# EAGLE board mobileduino_1.0 (EAGLE 6.2)
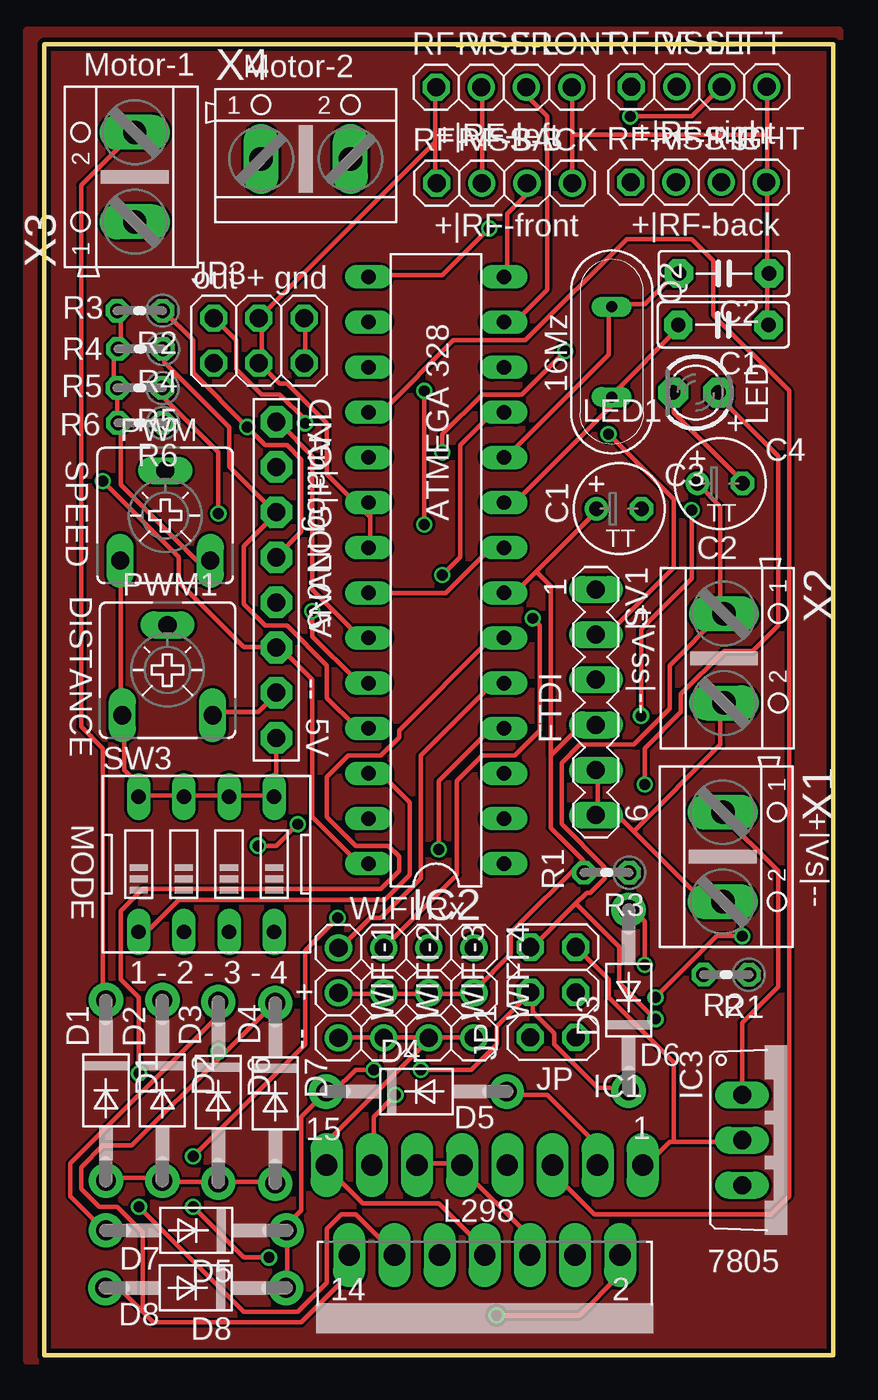
[diagram p0: board, top side]
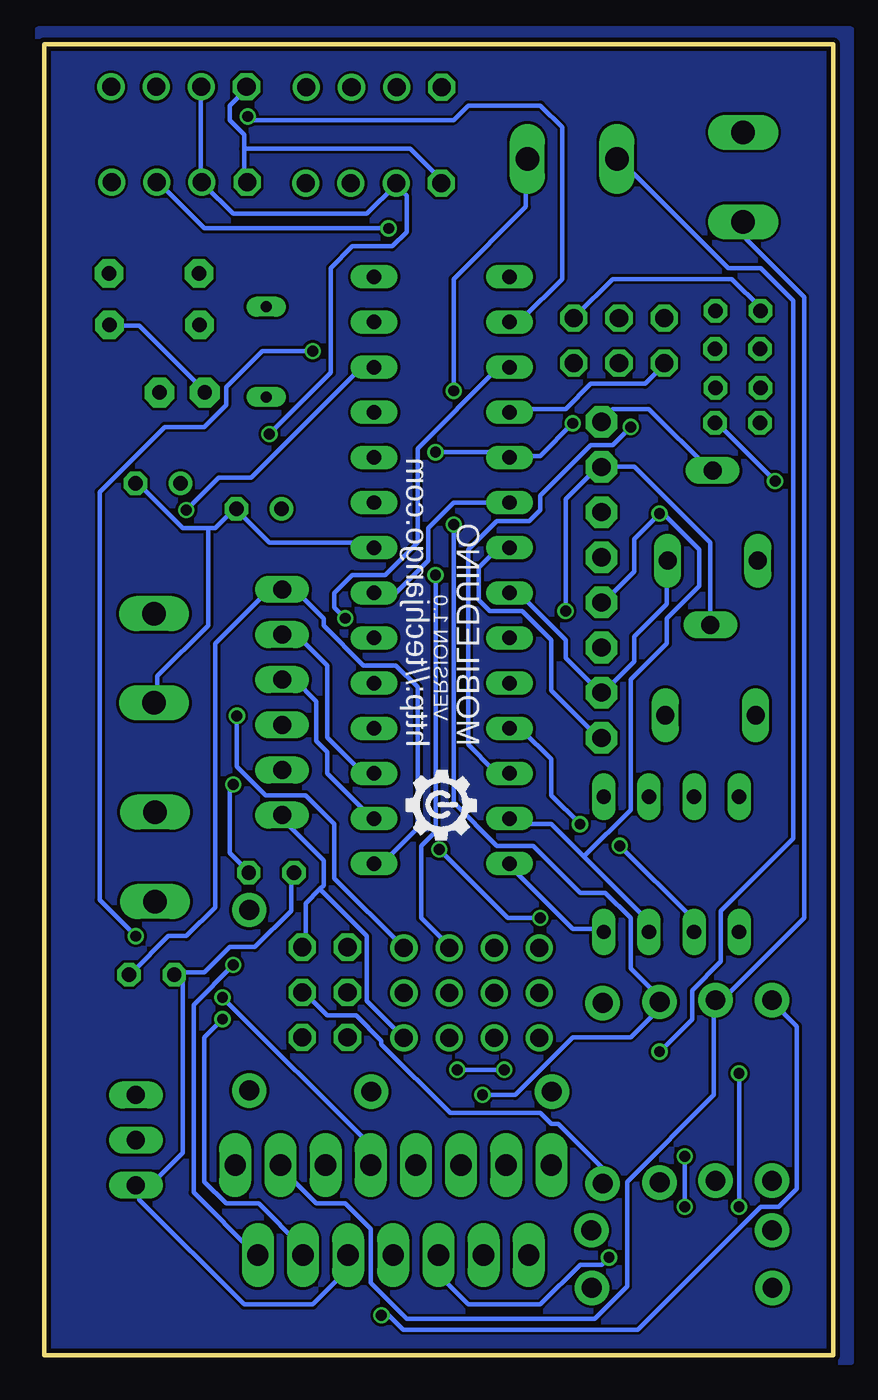
[diagram p1: board, bottom side, seen from below]

Size 44.39 x 73.76 mm. Coordinates in mm from the lower left corner, seen from the top.
Outline: 0,73.75 44.39,73.75 44.39,0 0,0 0,73.75
Copper layers (1*16): Top 0.035mm / dielectric 1.5mm / Bottom 0.035mm
Design rules: minimum track width 6mil, minimum drill 12mil, track to track 6mil, track to pad 6mil, pad to pad 6mil, via to via 6mil, smd to smd 0mil, copper to edge 10mil, drill to drill 10mil, minimum pad ring 10mil, minimum via ring 6mil, stop-mask expansion 2mil, vias tented up to drill 100mil, thermal gap 10mil

## Footprints (pad centres in the part's own frame; a part is rotated, then mirrored left to right if it is on the bottom)
1X08-BIG = drill 1.016 pad 1.778 octagon: 1 -8.89,0; 2 -6.35,0; 3 -3.81,0; 4 -1.27,0; 5 1.27,0; 6 3.81,0; 7 6.35,0; 8 8.89,0
C5B2.5 = drill 0.813 pad 1.6 octagon: 1 -2.54,0; 2 2.54,0
TT2D5 = drill 0.813: + -1.27,0 | drill 0.813 octagon: - 1.27,0
DO41-10 = drill 1.118 pad 1.93: A 5.08,0; C -5.08,0
MULTIWATT-15 = drill 1.2 long: 1 -8.89,-7.62; 2 -7.62,-2.54; 3 -6.35,-7.62; 4 -5.08,-2.54; 5 -3.81,-7.62; 6 -2.54,-2.54; 7 -1.27,-7.62; 8 0,-2.54; 9 1.27,-7.62; 10 2.54,-2.54; 11 3.81,-7.62; 12 5.08,-2.54; 13 6.35,-7.62; 14 7.62,-2.54; 15 8.89,-7.62
DIL28-3 = drill 0.813 long: 1 -16.51,-3.81; 2 -13.97,-3.81; 3 -11.43,-3.81; 4 -8.89,-3.81; 5 -6.35,-3.81; 6 -3.81,-3.81; 7 -1.27,-3.81; 8 1.27,-3.81; 9 3.81,-3.81; 10 6.35,-3.81; 11 8.89,-3.81; 12 11.43,-3.81; 13 13.97,-3.81; 14 16.51,-3.81; 15 16.51,3.81; 16 13.97,3.81; 17 11.43,3.81; 18 8.89,3.81; 19 6.35,3.81; 20 3.81,3.81; 21 1.27,3.81; 22 -1.27,3.81; 23 -3.81,3.81; 24 -6.35,3.81; 25 -8.89,3.81; 26 -11.43,3.81; 27 -13.97,3.81; 28 -16.51,3.81
TO220V = drill 1.016 long: 1 -2.54,-2.54; 2 0,-2.54; 3 2.54,-2.54
2X03 = drill 1.016 octagon: 1 -2.54,-1.27; 2 -2.54,1.27; 3 0,-1.27; 4 0,1.27; 5 2.54,-1.27; 6 2.54,1.27
LED3MM = drill 0.813 pad 1.676 octagon: A -1.27,0; K 1.27,0
CA6V = drill 1.016 long: A -2.54,-2.54; E 2.54,-2.54; S 0,2.54
QS = drill 0.61 long: 1 -2.54,0; 2 2.54,0
0204V = drill 0.813 octagon: 1 -1.27,0; 2 1.27,0
1X03 = drill 1.016: 1 -2.54,0; 2 0,0; 3 2.54,0
1X01 = drill 1.016 octagon: 1 0,0
MA06-1 = drill 1.016 long: 1 -6.35,0; 2 -3.81,0; 3 -1.27,0; 4 1.27,0; 5 3.81,0; 6 6.35,0
EDG-04 = drill 0.813 long: 1 -3.81,-3.81; 2 -1.27,-3.81; 3 1.27,-3.81; 4 3.81,-3.81; 5 3.81,3.81; 6 1.27,3.81; 7 -1.27,3.81; 8 -3.81,3.81
AK500/2 = drill 1.321 long: 1 -2.515,0; 2 2.515,0

## Placement (x,y rotation side)
ANALOG|+|GND  [1X08-BIG]  13.05,43.62 270 top
C1  [C5B2.5]  38.2,57.98 180 top
C2  [C5B2.5]  38.23,60.86 180 top
C3  [TT2D5]  32.32,47.62 0 top
C4  [TT2D5]  38,49.05 0 top
D1  1N4004  [DO41-10]  3.46,14.89 270 top
D2  1N4004  [DO41-10]  6.64,14.89 270 top
D3  1N4004  [DO41-10]  32.86,19.97 90 top
D4  1N4004  [DO41-10]  20.92,14.83 0 top
D5  1N4004  [DO41-10]  8.54,7.02 180 top
D6  1N4004  [DO41-10]  9.78,14.8 270 top
D7  1N4004  [DO41-10]  12.99,14.73 270 top
D8  1N4004  [DO41-10]  8.51,3.78 180 top
IC1  L298  [MULTIWATT-15]  24.77,3.08 180 top
IC2  ATMEGA168V-10P  [DIL28-3]  22.03,44.16 90 top
IC3  7805TV  [TO220V]  41.78,12.1 270 top
JP1  [2X03]  28.61,20.42 90 top
JP3  [2X03]  12.06,57.09 0 top
LED1  [LED3MM]  36.64,54.17 180 top
PWM  [CA6V]  6.79,47.24 0 top
PWM1  [CA6V]  6.92,38.54 0 top
Q2  [QS]  31.91,56.45 270 top
R1  [0204V]  38.35,21.4 180 top
R2  [0204V]  5.37,58.77 180 top
R3  [0204V]  31.62,27.15 180 top
R4  [0204V]  5.4,56.61 180 top
R5  [0204V]  5.37,54.42 180 top
R6  [0204V]  5.4,52.45 180 top
RF-BACK  [1X03]  27.15,65.94 0 top
RF-FRONT  [1X03]  27.11,71.34 0 top
RF-LEFT  [1X03]  38.1,71.37 0 top
RF-RIGHT  [1X03]  38.07,66.01 0 top
RF-VSS-B  [1X01]  22.07,65.94 0 top
RF-VSS-F  [1X01]  33.02,71.37 0 top
RF-VSS-L  [1X01]  22.03,71.34 0 top
RF-VSS-R  [1X01]  32.99,66.01 0 top
SV1  [MA06-1]  31.02,36.73 270 top
SW3  [EDG-04]  9.11,27.62 0 top
WIFI-1  [1X03]  16.54,20.38 270 top
WIFI-2  [1X03]  19.08,20.38 270 top
WIFI-3  [1X03]  21.62,20.38 270 top
WIFI-4  [1X03]  24.16,20.38 270 top
X1  [AK500/2]  38.16,28.04 270 top
X2  [AK500/2]  38.23,39.21 270 top
X3  [AK500/2]  5.08,66.29 90 top
X4  [AK500/2]  14.7,67.31 0 top

## Library data of the parts
ANALOG|+|GND C3 C4 D1-D8 IC2 LED1 R1-R6 RF-BACK RF-FRONT RF-LEFT RF-RIGHT WIFI-1-WIFI-4 = adafruit
C1 C2 = capacitor-wima
IC1 = st-microelectronics
IC3 = linear
JP1 JP3 RF-VSS-B RF-VSS-F RF-VSS-L RF-VSS-R = pinhead
PWM PWM1 = pot
Q2 SW3 = special
SV1 = con-lstb
X1-X4 = con-ptr500

## Nets
N$1: IC1.5 IC2.18 JP3.1
N$2: D1.C D3.A IC1.2 X3.2
N$3: D2.C D4.A IC1.3 X3.1
N$4: D5.A D6.C IC1.13 X4.2
N$5: D7.C D8.A IC1.14 X4.1
N$6: C4.+ IC1.4 JP1.6 X2.1
N$7: IC2.1 R1.1 SV1.1
N$8: C1.2 IC2.9 Q2.2
N$9: IC1.7 IC2.19 JP3.2
N$10: C2.2 IC2.10 Q2.1
N$11: IC3.1 X1.1
N$12: IC2.16 RF-LEFT.2
N$13: ANALOG|+|GND.1 IC2.23 PWM.S
N$14: IC2.12 WIFI-4.1
N$15: IC2.11 WIFI-3.1
N$16: IC2.17 WIFI-2.1
N$17: IC2.5 WIFI-1.1
N$18: D3.C D4.C D5.C D8.C JP1.4
N$19: IC1.10 IC2.4
N$20: IC1.12 IC2.6
N$21: IC2.15 RF-RIGHT.2
N$22: ANALOG|+|GND.7 C1.1 C2.1 C3.- C4.- IC1.1 IC1.8 IC1.15 IC2.8 IC2.22 IC3.2 JP1.5 JP3.5 JP3.6 LED1.K PWM1.E PWM.E R2.2 R4.2 R5.2 R6.2 RF-BACK.3 RF-FRONT.3 RF-LEFT.3 RF-RIGHT.3 SV1.5 SV1.6 WIFI-1.3 WIFI-2.3 WIFI-3.3 WIFI-4.3 X1.2 X2.2
N$23: IC2.14 RF-BACK.2
N$24: IC2.13 RF-FRONT.2
N$25: IC2.3 RF-BACK.1 RF-FRONT.1 RF-LEFT.1 RF-RIGHT.1 SV1.2
N$27: D1.A D2.A D6.A D7.A JP1.3
N$28: ANALOG|+|GND.2 IC2.24 PWM1.S
N$29: ANALOG|+|GND.3 IC2.25 R4.1 SW3.2
N$30: ANALOG|+|GND.4 IC2.26 R2.1 SW3.1
N$31: ANALOG|+|GND.5 IC2.27 R5.1 SW3.3
N$32: IC2.2 SV1.3
N$33: LED1.A R3.1
N$72: ANALOG|+|GND.6 IC2.28 R6.1 SW3.4
N$74: ANALOG|+|GND.8 C3.+ IC1.6 IC1.9 IC1.11 IC2.7 IC2.20 IC2.21 IC3.3 JP3.3 JP3.4 PWM1.A PWM.A R1.2 R3.2 RF-VSS-B.1 RF-VSS-F.1 RF-VSS-L.1 RF-VSS-R.1 SV1.4 SW3.5 SW3.6 SW3.7 SW3.8 WIFI-1.2 WIFI-2.2 WIFI-3.2 WIFI-4.2

## Tracks (layer width: path | path; a pad name or v marks a point on that pad's centre or on a via)
GND
  pour Bottom: -0.98,74.58 44.74,74.58 44.74,-0.35 -0.98,-0.35
  pour Top: -0.98,74.58 44.74,74.58 44.74,-0.35 -0.98,-0.35
N$1
  Top 0.254: IC1.5 28.68,10.57 28.68,10.17 30.92,7.93 40.87,7.93 41.89,8.95 41.89,54.26 37.62,58.53 37.62,61.58 36.4,62.79 32.75,62.79 27.06,57.11 22.99,57.11 19.13,53.24 18.32,53.24 IC2.18
  Bottom 0.254: IC2.18 18.12,53.24 15.07,53.24 13.65,54.67 10.6,54.67 9.58,55.68 JP3.1
N$2  (via drill 0.61)
  Top 0.254: v33.76,21.95 33.76,24.39 32.95,25.2 D3.A | D1.C 3.28,20.12 3.28,34.14 2.06,35.36 2.06,65.84 4.91,68.69 X3.2 | v25.43,2.24 30.11,2.24 32.34,4.48 32.34,5.49 IC1.2
  Bottom 0.254: v33.76,21.95 36,19.72 36,9.15 32.54,5.7 IC1.2 | v25.43,2.24 25.03,2.24 24.21,1.43 11,1.43 4.1,8.34 3.08,8.34 2.06,9.35 2.06,18.5 3.49,19.92 D1.C
N$3
  Top 0.254: IC1.3 30.92,10.78 30.92,11.99 28.28,14.64 26.04,14.64 D4.A
  Bottom 0.254: 6.74,19.51 6.74,14.64 11.61,9.76 11.61,3.87 13.44,2.04 24.01,2.04 26.04,4.07 26.04,7.12 27.46,8.54 29.09,8.54 31.12,10.57 IC1.3 | 6.74,19.51 6.74,19.92 D2.C 6.74,19.51 | 6.74,19.51 1.66,24.59 1.66,59.54 4.91,62.79 4.91,63.61 X3.1
N$4  (via drill 0.61)
  Top 0.254: v19.74,14.64 18.52,13.42 18.52,10.78 IC1.13 | D5.A 3.28,7.12 1.45,8.95 1.45,10.78 9.58,18.9 9.58,19.72 D6.C | v21.37,46.74 v21.37,54.26
  Bottom 0.254: v19.74,14.64 17.91,14.64 14.66,17.89 11.41,17.89 9.58,19.72 D6.C 9.58,19.92 11.41,21.75 11.41,24.59 12.83,26.02 14.26,26.02 16.9,28.66 18.93,28.66 21.37,31.1 v21.37,46.74 | v21.37,54.26 21.37,60.56 17.3,64.62 17.3,67.27 X4.2
N$5  (via drill 0.61)
  Top 0.254: 5.52,2.44 4.3,3.66 3.49,3.66 D8.A | 5.52,2.44 6.13,1.83 14.46,1.83 17.1,4.48 17.1,5.49 IC1.14 | 9.99,16.87 4.91,11.79 3.28,11.79 2.06,10.57 2.06,9.35 3.08,8.34 4.1,8.34 5.52,6.91 5.52,2.44 | 9.99,16.87 12.83,19.72 D7.C | 9.99,16.87 v9.79,17.07
  Bottom 0.254: v9.79,17.07 7.96,18.9 7.96,20.53 6.33,22.15 6.33,25 2.27,29.06 2.27,59.34 4.1,61.17 5.92,61.17 12.02,67.27 X4.1
N$6  (via drill 0.61)
  Top 0.254: C4.+ 36.81,48.98 38.03,47.76 38.03,41.87 X2.1 38.03,41.66 35.19,38.82 35.19,36.38 33.15,34.35 30.11,34.35 29.09,33.33 29.09,29.88 31.53,27.44 31.53,26.83 30.71,26.02 30.51,26.02 29.9,25.41 | 29.9,25.41 27.46,22.97 JP1.6 | v34.37,18.9 32.34,20.94 32.34,22.97 29.9,25.41
  Bottom 0.254: v34.37,18.9 35.39,17.89 35.39,9.76 34.17,8.54 32.34,8.54 29.9,6.1 29.9,5.7 IC1.4
N$7
  Bottom 0.254: IC2.1 25.84,27.84 25.23,27.84 23.4,29.67 23.4,37.6 24.62,38.82 26.45,38.82 28.68,41.05 28.68,41.46 30.31,43.08 30.92,43.08 SV1.1 31.12,43.08 31.73,43.08 34.78,40.04 34.78,25.2 36.4,23.58 37.42,23.58 39.45,21.55 R1.1
N$8
  Top 0.254: C1.2 35.79,57.92 31.93,54.06 Q2.2 31.93,53.85 31.93,53.45 26.65,48.16 26.04,48.16 IC2.9
N$9  (via drill 0.61)
  Top 0.254: v14.66,52.43 14.66,52.63 13.24,54.06 12.22,54.06 10.8,55.48 10.8,57.11 9.58,58.32 JP3.2 | v34.37,20.12 37.83,23.58 v39.25,23.58 | v29.29,56.5 26.85,54.06 24.62,54.06 22.38,51.82 v22.38,50.81
  Bottom 0.254: v14.66,52.43 16.49,50.6 18.12,50.6 IC2.19 18.32,50.6 18.52,50.81 v22.38,50.81 | v34.37,20.12 26.04,11.79 26.04,10.78 IC1.7 | v39.25,23.58 41.28,25.61 41.28,48.57 37.62,52.23 35.39,52.23 34.17,53.45 34.17,54.46 32.14,56.5 v29.29,56.5
N$10
  Top 0.254: C2.2 35.59,60.97 33.76,59.14 31.93,59.14 Q2.1 31.73,58.93 31.73,56.29 26.04,50.6 IC2.10
N$11
  Top 0.254: IC3.1 39.25,18.7 41.28,20.73 41.28,27.23 38.03,30.49 X1.1
N$12  (via drill 0.61)
  Top 0.254: v32.95,69.7 36.4,69.7 38.03,71.33 RF-LEFT.2
  Bottom 0.254: v32.95,69.7 32.75,69.5 21.37,69.5 20.55,70.31 16.49,70.31 15.27,69.09 15.27,60.56 17.51,58.32 18.12,58.32 IC2.16
N$13
  Top 0.254: IC2.23 18.12,40.44 17.71,40.44 15.07,43.08 15.07,50.6 13.24,52.43 ANALOG|+|GND.1
  Bottom 0.254: PWM.S 6.94,49.79 10.39,53.24 12.43,53.24 13.04,52.63 ANALOG|+|GND.1
N$14  (via drill 0.61)
  Top 0.254: v36.4,47.55 36.4,43.69 33.56,40.85 v33.56,35.97
  Bottom 0.254: v36.4,47.55 34.58,49.38 32.75,49.38 26.65,55.48 26.04,55.48 IC2.12 | v33.56,35.97 33.56,33.13 31.93,31.5 29.7,31.5 28.07,29.88 28.07,26.83 24.21,22.97 WIFI-4.1
N$15  (via drill 0.61)
  Top 0.254: v22.38,43.9 23.4,44.91 23.4,51.21 25.23,53.04 IC2.11
  Bottom 0.254: v22.38,43.9 22.38,29.47 23.2,28.66 23.2,24.59 21.57,22.97 WIFI-3.1
N$16  (via drill 0.61)
  Top 0.254: v27.46,41.46 27.87,41.05 27.87,35.16 26.45,33.74 24.62,33.74 23.2,32.31 23.2,27.03 19.13,22.97 WIFI-2.1
  Bottom 0.254: v27.46,41.46 28.07,42.07 28.07,42.88 27.06,43.9 25.23,43.9 23.4,45.73 23.4,51.01 18.93,55.48 18.32,55.48 IC2.17
N$17
  Top 0.254: IC2.5 25.23,37.8 21.16,33.74 21.16,26.83 18.93,24.59 18.32,24.59 16.69,22.97 WIFI-1.1
N$18  (via drill 0.61)
  Top 0.254: D3.C 32.75,15.04 31.12,15.04 28.68,17.48 28.68,18.09 27.46,19.31 27.46,20.33 JP1.4 27.26,20.33 25.43,18.5 25.43,17.48 24.01,16.06 v21.16,16.06 | D8.C 13.65,3.87 13.65,6.91 D5.C 13.44,7.12 14.46,8.13 14.46,13.42 15.68,14.64 D4.C 15.88,14.84 16.29,14.84 17.51,16.06 v18.52,16.06
  Bottom 0.254: v18.52,16.06 v21.16,16.06
N$19  (via drill 0.61)
  Top 0.254: v22.18,28.45 22.18,32.31 25.03,35.16 25.84,35.16 IC2.4 | v16.49,24.59 14.66,22.76 14.66,17.48 v8.36,11.18 | v8.36,8.34 11.21,5.49 v12.63,5.49
  Bottom 0.254: v22.18,28.45 18.32,24.59 v16.49,24.59 | v8.36,8.34 v8.36,11.18 | v12.63,5.49 13.04,5.09 14.26,5.09 16.49,2.85 20.55,2.85 22.18,4.48 22.18,5.49 IC1.10
N$20  (via drill 0.61)
  Top 0.254: v5.31,15.86 5.31,20.12 4.3,21.14 4.3,25 5.52,26.22 18.93,26.22 19.95,27.23 19.95,28.05 19.34,28.66 17.51,28.66 15.88,30.28 15.88,32.52 17.1,33.74 18.93,33.74 19.95,34.75 19.95,35.16 25.03,40.24 25.84,40.24 IC2.6 | v5.31,8.34 11.21,2.44 14.26,2.44 15.88,4.07 15.88,7.12 16.69,7.93 17.51,7.93 19.74,5.7 IC1.12
  Bottom 0.254: v5.31,8.34 v5.31,15.86
N$21  (via drill 0.61)
  Top 0.254: v25.03,63.4 22.38,60.76 18.32,60.76 IC2.15
  Bottom 0.254: v25.03,63.4 35.39,63.4 38.03,66.05 RF-RIGHT.2
N$22
  Top 0.254: WIFI-1.3 16.69,17.89 18.93,17.89 WIFI-2.3 19.13,17.89 21.57,17.89 WIFI-3.3 | WIFI-4.3 24.01,17.89 21.77,17.89 WIFI-3.3 | WIFI-3.3 21.57,17.68 15.88,11.99 15.88,10.78 IC1.15 15.88,10.57 17.91,8.54 22.18,8.54 24.62,6.1 24.62,5.7 IC1.8 | 35.39,11.99 35.19,11.99 33.76,10.57 IC1.1 | 35.39,11.99 39.05,11.99 IC3.2 | SV1.5 31.12,32.92 31.12,30.49 SV1.6 31.12,30.28 32.34,30.28 33.15,29.47 | 33.15,29.47 37.01,25.61 38.03,25.61 X1.2 | 33.15,29.47 38.03,34.35 38.03,36.58 X2.2 | 35.39,11.99 35.39,16.47 31.73,20.12 31.73,21.14 29.9,22.97 JP1.5 | 29.7,68.69 29.7,71.33 RF-FRONT.3 | 29.7,68.69 29.7,66.05 RF-BACK.3 | 40.67,68.69 40.67,66.05 RF-RIGHT.3 40.67,65.84 40.67,60.97 C2.1 40.67,60.76 40.67,58.12 C1.1 | 40.67,68.69 40.67,71.33 RF-LEFT.3 | 40.67,68.69 29.7,68.69 | C4.- 39.25,49.18 35.39,53.04 35.39,54.06 LED1.K | JP3.5 14.66,55.89 14.66,58.32 JP3.6 | R2.2 4.1,58.73 4.3,58.53 4.3,56.7 R4.2 4.1,56.5 3.89,56.29 3.89,54.46 R5.2 4.1,54.26 4.1,52.63 R6.2 4.3,52.43 4.3,48.98 8.57,44.71 9.18,44.71 PWM.E | IC2.22 18.32,42.88 22.59,42.88 25.03,45.32 25.84,45.32 IC2.8 | PWM1.E 9.58,36.18 12.02,36.18 13.04,37.19 ANALOG|+|GND.7
  Bottom 0.254: 28.89,26.22 28.68,26.42 28.68,27.84 31.12,30.28 SV1.6 | 28.89,26.22 29.7,25.41 29.7,22.97 JP1.5 | 28.89,26.22 26.24,23.58 26.24,19.92 24.21,17.89 WIFI-4.3 | 35.19,46.54 36.61,46.54 39.25,49.18 C4.- | 35.19,46.54 34.78,46.54 33.76,47.55 C3.- 33.56,47.55 31.73,45.73 26.24,45.73 26.04,45.52 IC2.8 | LED1.K 35.39,54.26 39.05,57.92 40.67,57.92 C1.1 | JP3.6 14.46,58.53 12.43,60.56 5.72,60.56 4.1,58.93 R2.2 | PWM.E 9.38,44.51 9.38,42.27 11.21,40.44 11.21,39.02 13.04,37.19 ANALOG|+|GND.7 13.24,37.39 15.07,39.22 15.07,40.24 17.71,42.88 18.12,42.88 IC2.22 | 35.19,46.54 35.19,41.05 38.03,38.21 38.03,36.79 X2.2
N$23
  Top 0.254: IC2.14 26.04,60.76 26.04,64.22 27.06,65.23 27.06,65.84 RF-BACK.2
N$24
  Top 0.254: IC2.13 26.04,58.32 26.65,58.32 28.28,59.95 28.28,69.7 27.26,70.72 27.26,71.33 RF-FRONT.2
N$25  (via drill 0.61)
  Top 0.254: RF-FRONT.1 24.62,71.33 24.62,66.05 RF-BACK.1 | v31.73,51.82 35.39,48.16 35.39,44.3 31.73,40.65 31.12,40.65 SV1.2
  Bottom 0.254: IC2.3 26.04,32.92 26.65,32.92 28.48,34.75 28.48,38.82 30.11,40.44 30.92,40.44 SV1.2 | RF-LEFT.1 35.59,71.33 35.59,66.05 RF-RIGHT.1 35.39,65.84 33.76,64.22 26.24,64.22 24.62,65.84 | v31.73,51.82 28.28,55.28 28.28,61.17 27.06,62.39 24.82,62.39 24.01,63.2 24.01,65.23 24.62,65.84 | 24.62,65.84 RF-BACK.1
N$27
  Top 0.254: D1.A 3.49,9.96 6.53,9.96 D2.A 6.74,9.76 9.58,9.76 D6.A 9.79,9.76 12.83,9.76 D7.A
  Bottom 0.254: JP1.3 29.7,20.33 28.48,19.11 26.85,19.11 25.43,17.68 25.43,17.48 21.57,13.62 16.49,13.62 15.88,13.01 15.47,13.01 13.04,10.57 13.04,9.76 D7.A
N$28  (via drill 0.61)
  Top 0.254: v15.07,41.87 15.07,40.44 17.51,38 18.12,38 IC2.24
  Bottom 0.254: v15.07,41.87 15.07,48.16 13.24,49.99 ANALOG|+|GND.2 13.04,49.99 11.21,49.99 6.94,45.73 6.94,41.26 PWM1.S
N$29  (via drill 0.61)
  Top 0.254: 13.04,47.35 10.39,49.99 10.39,52.23 6.74,55.89 6.74,56.5 R4.1 | v12.02,28.66 13.04,28.66 v14.26,29.88 | 13.04,47.35 11.21,45.52 11.21,42.27 12.43,41.05 13.65,41.05 15.88,38.82 15.88,36.99 17.51,35.36 18.12,35.36 IC2.25 | 13.04,47.35 ANALOG|+|GND.3
  Bottom 0.254: v12.02,28.66 7.96,24.59 7.96,23.98 SW3.2 | v14.26,29.88 15.88,31.5 15.88,33.53 17.51,35.16 18.12,35.16 IC2.25
N$30  (via drill 0.61)
  Top 0.254: R2.1 6.74,58.73 8.36,57.11 8.36,55.28 v11.41,52.23 12.43,51.21 13.65,51.21 14.46,50.4 14.46,46.34 13.04,44.91 ANALOG|+|GND.4 | SW3.1 5.31,23.98 5.92,23.98 7.55,25.61 19.13,25.61 20.55,27.03 20.55,31.1 18.93,32.72 18.32,32.72 IC2.26
  Bottom 0.254: v11.41,52.23 12.43,51.21 13.65,51.21 16.49,48.37 16.49,47.55 17.1,46.95 18.93,46.95 20.55,45.32 20.55,34.35 19.13,32.92 18.32,32.92 IC2.26
N$31  (via drill 0.61)
  Top 0.254: v9.79,47.35 9.79,50.81 6.74,53.85 6.74,54.26 R5.1
  Bottom 0.254: 14.05,28.05 15.88,29.88 17.91,29.88 18.12,30.08 IC2.27 | 14.05,28.05 10.39,24.39 10.39,23.98 SW3.3 | ANALOG|+|GND.5 13.04,42.27 11.21,44.1 11.21,45.93 v9.79,47.35 9.58,47.35 7.55,45.32 7.55,43.29 9.38,41.46 9.38,40.04 11.41,38 11.41,30.69 14.05,28.05
N$32
  Bottom 0.254: IC2.2 26.04,30.28 28.48,32.72 28.48,33.94 29.09,34.55 29.09,36.79 30.31,38 30.92,38 SV1.3
N$33  (via drill 0.61)
  Top 0.254: v33.76,32.11 33.76,34.14 35.79,36.18 35.79,37.19 38.23,39.63 39.86,39.63 41.28,41.05 41.28,50.6 37.83,54.06 LED1.A
  Bottom 0.254: v33.76,32.11 33.97,31.91 33.97,28.25 32.95,27.23 R3.1
N$72  (via drill 0.61)
  Top 0.254: v3.28,49.18 7.55,44.91 7.55,43.49 11.21,39.83 13.04,39.83 ANALOG|+|GND.6 13.24,39.83 15.07,38 15.07,30.28 17.51,27.84 18.12,27.84 IC2.28
  Bottom 0.254: SW3.4 13.04,23.98 14.66,23.98 18.32,27.64 IC2.28 | v3.28,49.18 6.53,52.43 R6.1
N$74
  Top 0.254: 21.98,68.28 21.98,66.05 RF-VSS-B.1 | 21.98,68.28 21.98,71.33 RF-VSS-L.1 | 21.98,68.28 12.22,58.53 JP3.4 12.22,58.32 12.22,55.89 JP3.3 12.22,55.68 13.24,54.67 13.65,54.67 15.88,52.43 15.88,49.59 18.32,47.15 | 5.92,31.5 7.75,31.5 SW3.7 7.96,31.5 10.19,31.5 SW3.6 10.39,31.5 12.83,31.5 SW3.5 13.04,31.5 13.04,34.55 ANALOG|+|GND.8 | 5.92,31.5 5.31,31.5 SW3.8 5.92,31.5 | 5.92,31.5 4.5,32.92 4.5,35.97 PWM1.A 4.3,36.18 4.3,44.51 PWM.A | 18.32,47.15 18.32,47.96 IC2.20 | 18.32,47.15 18.32,45.52 IC2.21 | 27.67,44.1 31.12,47.55 C3.+ | 27.67,44.1 26.65,43.08 26.04,43.08 IC2.7 | IC1.11 20.96,10.78 23.4,10.78 IC1.9 23.4,10.57 27.26,6.71 27.26,5.7 IC1.6 | WIFI-1.2 16.69,20.33 18.93,20.33 WIFI-2.2 19.13,20.33 21.57,20.33 WIFI-3.2 21.77,20.33 24.01,20.33 WIFI-4.2 24.21,20.53 26.24,22.56 26.24,23.78 30.31,27.84 | 30.31,27.84 30.31,27.23 R3.2 | 30.31,27.84 28.48,29.67 28.48,33.74 | 28.48,33.74 30.11,35.36 30.92,35.36 SV1.4 | 27.67,44.1 28.48,43.29 28.48,33.74
  Bottom 0.254: 33.15,67.87 33.15,68.69 33.97,69.5 33.97,70.31 32.95,71.33 RF-VSS-F.1 | 33.15,67.87 33.15,66.05 RF-VSS-R.1 | 33.15,67.87 23.81,67.87 21.98,66.05 RF-VSS-B.1 | IC2.20 18.32,47.96 21.37,47.96 22.79,46.54 22.79,44.71 24.62,42.88 IC2.7 | 36.61,21.55 35.39,21.55 33.97,22.97 32.54,22.97 30.51,25 30.51,27.03 R3.2 | 36.61,21.55 37.01,21.55 R1.2 36.61,21.55 | 36.61,21.55 36.61,11.39 38.44,9.56 39.05,9.56 IC3.3 39.05,9.35 39.05,8.74 33.15,2.85 29.29,2.85 27.46,4.68 27.46,5.49 IC1.6 | ANALOG|+|GND.8 13.24,34.75 15.88,37.39 15.88,40.24 17.51,41.87 19.34,41.87 19.95,42.47 19.95,44.3 18.93,45.32 18.32,45.32 IC2.21

## Text on the board
tPlace: Motor-2 | Motor-1 | +|RF-left | +|RF-right | +|RF-front | +|RF-back | out + gnd | R3 | 16Mz | R4 | R5 | R6 | Analog IN 0-5 | LED | SPEED | ATMEGA 328 | C1 | C2 | DISTANCE | +|Vss|-- | -- | 5V | FTDI | +|Vs|-- | MODE | R1 | WIFI/Rx | 1 - 2 - 3 - 4 | + -- | R2 | D1 | D2 | D3 | D4 | D6 | JP | D5 | L298 | 7805 | D7 | D8
bPlace: VERSION 1.0 | MOBILEDUINO | http://techjango.com